# EAGLE board BalanceBoard (EAGLE 6.3)
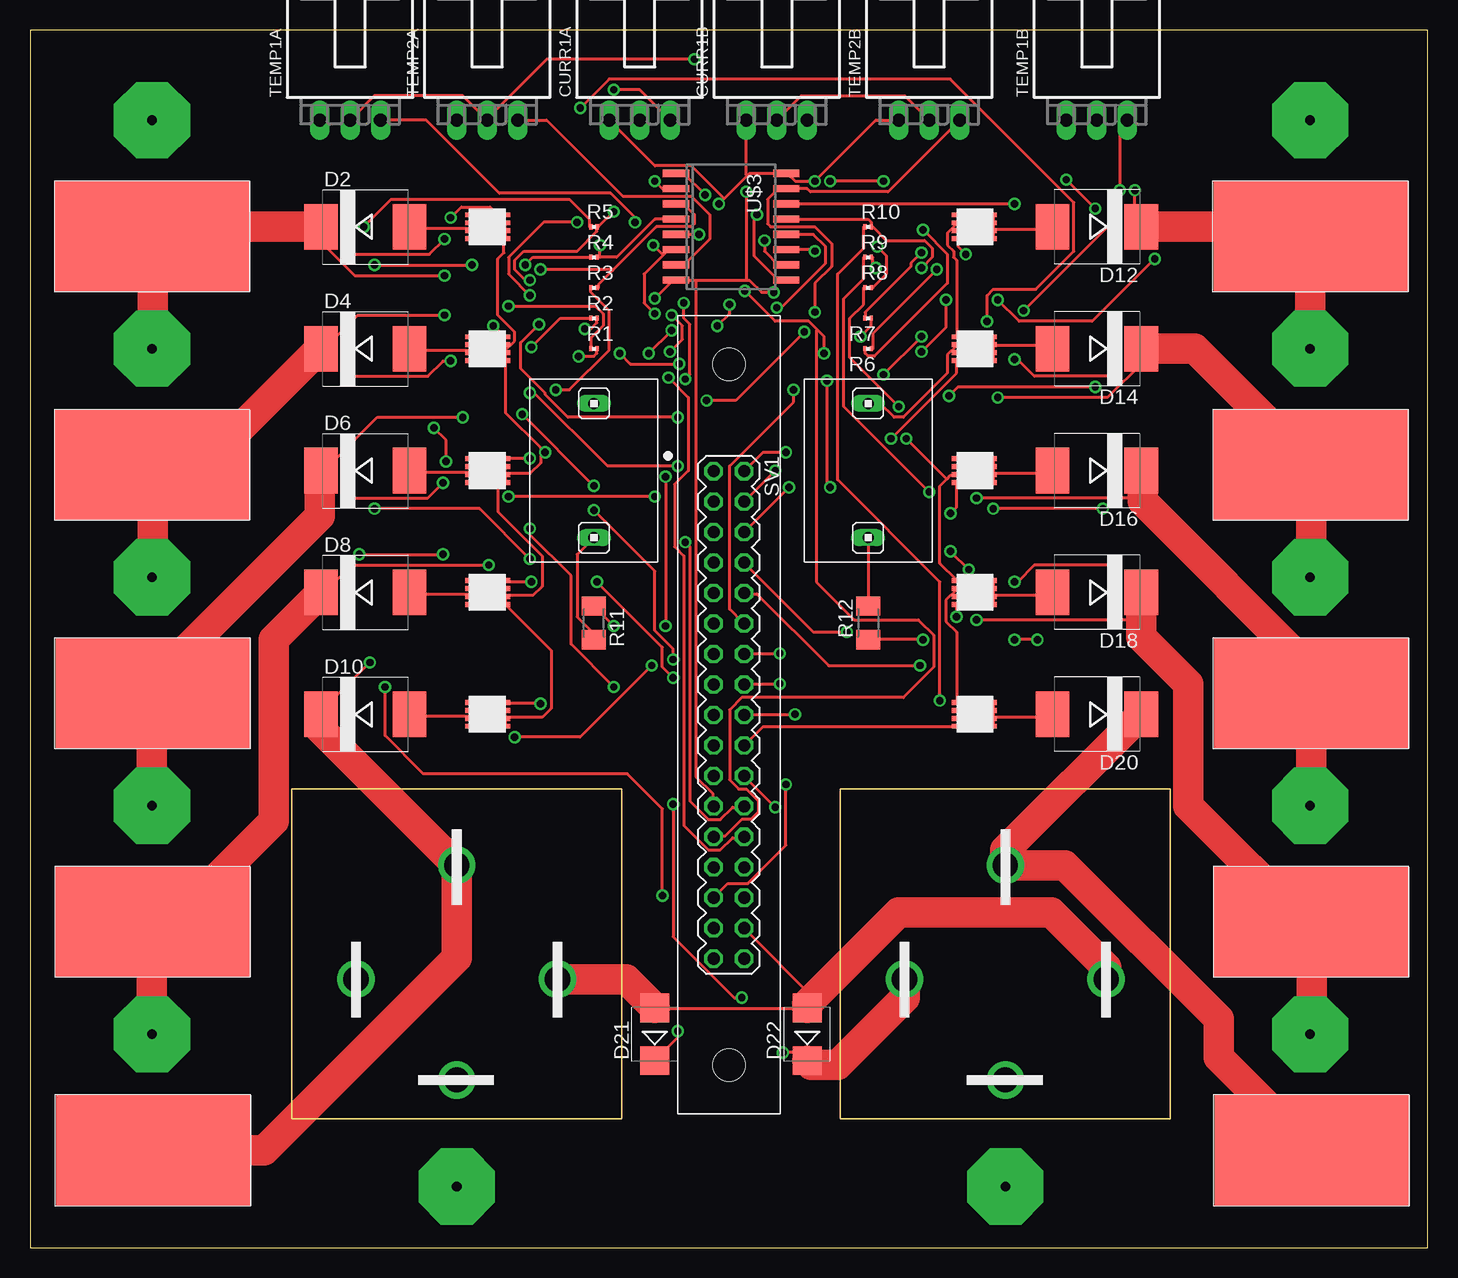
[diagram p0: board, top side]
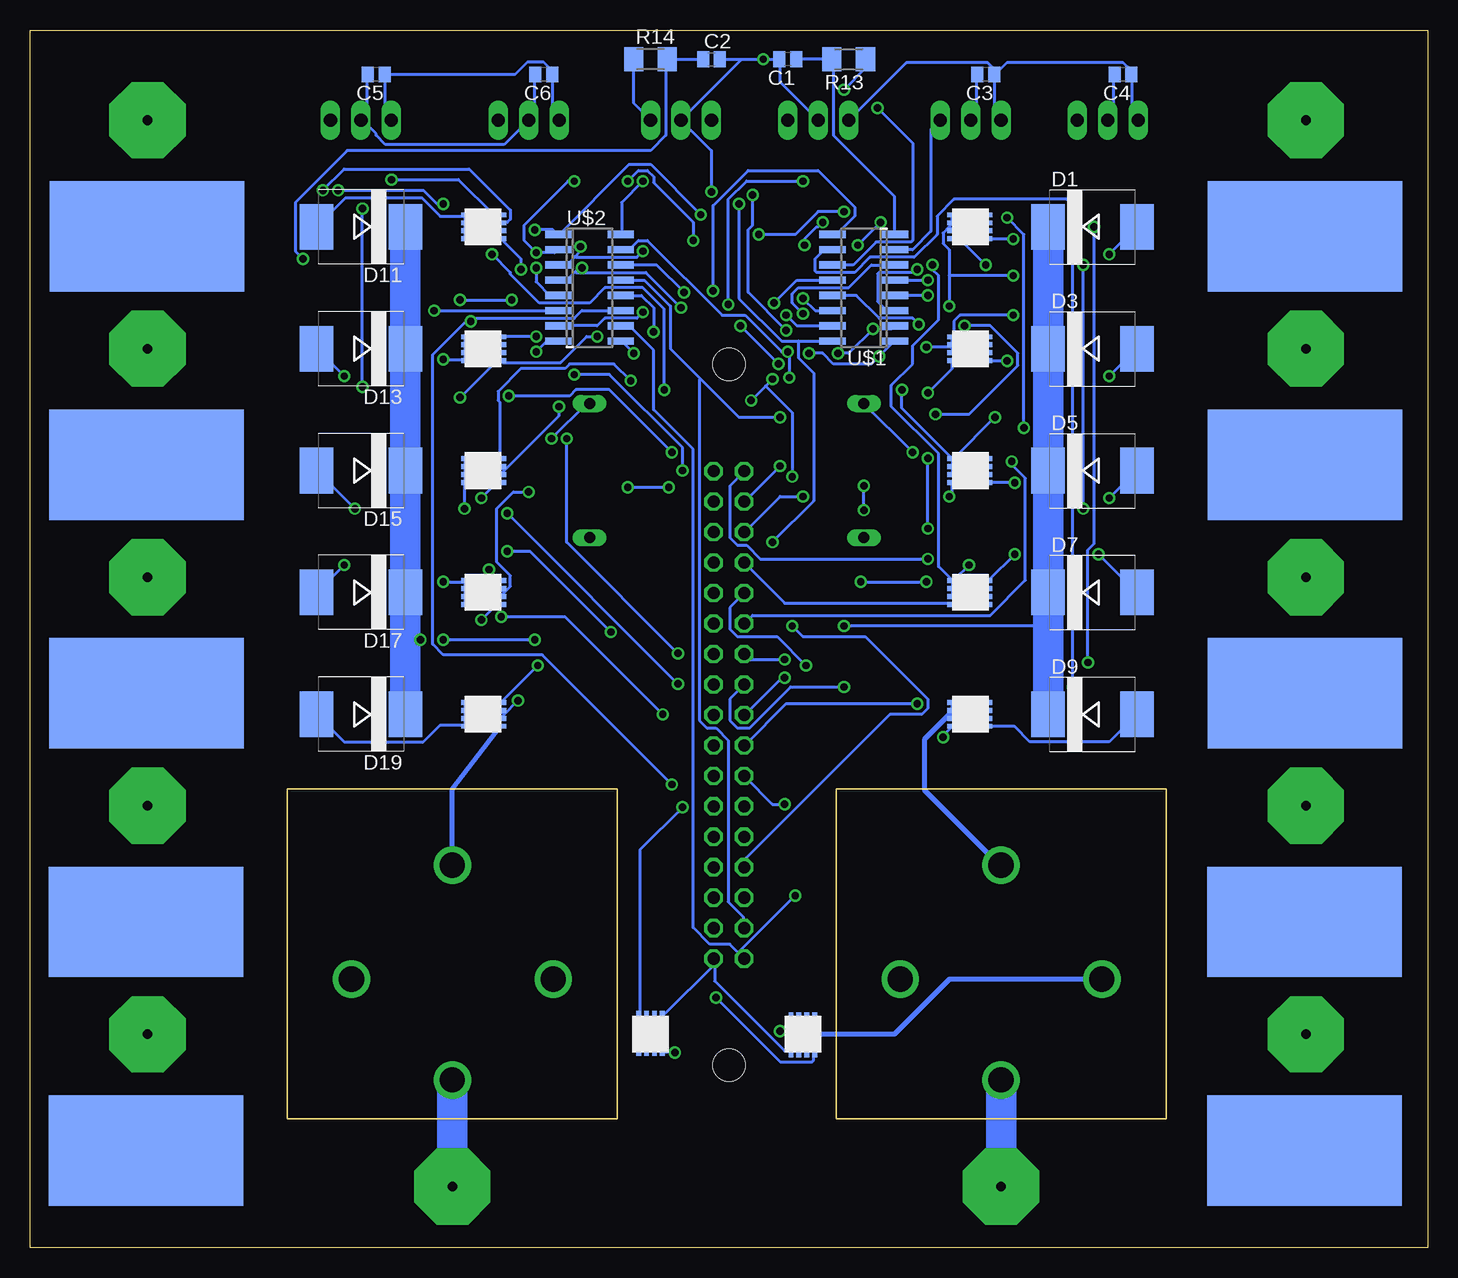
[diagram p1: board, bottom side, seen from below]

Size 116.48 x 101.5 mm. Coordinates in mm from the lower left corner, seen from the top.
Outline: 0,0 116.48,0 116.48,101.5 0,101.5 0,0
Copper layers (1*16): Top 0.035mm / dielectric 1.5mm / Bottom 0.035mm
Design rules "default": minimum track width 10mil, minimum drill 24mil, track to track 8mil, track to pad 8mil, pad to pad 8mil, via to via 8mil, smd to smd 8mil, copper to edge 40mil, drill to drill 8mil, minimum pad ring 10mil, minimum via ring 8mil, stop-mask expansion 4mil, vias tented up to drill 0mil, thermal gap 10mil

## Footprints (pad centres in the part's own frame; a part is rotated, then mirrored left to right if it is on the bottom)
C0504 = smd 1 x 1.3: 1 -0.7,0; 2 0.7,0
70553-03 = drill 1.092 long: 1 -2.54,-7.62; 2 0,-7.62; 3 2.54,-7.62
SMC = smd 2.8 x 3.8: A 3.7,0; C -3.7,0
SMB = smd 2.4 x 2.4: A 2.2,0; C -2.2,0
INDUCTOR_SOCKET = drill 0.914 long: P$1 -5.588,0; P$2 5.588,0
R0201 = smd 0.28 x 0.43: 1 -0.255,0; 2 0.255,0
M1206 = smd 1.6 x 2: 1 -1.4,0; 2 1.4,0
MA17-2 = drill 1.016 octagon: 1 -20.32,-1.27; 2 -20.32,1.27; 3 -17.78,-1.27; 4 -17.78,1.27; 5 -15.24,-1.27; 6 -15.24,1.27; 7 -12.7,-1.27; 8 -12.7,1.27; 9 -10.16,-1.27; 10 -10.16,1.27; 11 -7.62,-1.27; 12 -7.62,1.27; 13 -5.08,-1.27; 14 -5.08,1.27; 15 -2.54,-1.27; 16 -2.54,1.27; 17 0,-1.27; 18 0,1.27; 19 2.54,-1.27; 20 2.54,1.27; 21 5.08,-1.27; 22 5.08,1.27; 23 7.62,-1.27; 24 7.62,1.27; 25 10.16,-1.27; 26 10.16,1.27; 27 12.7,-1.27; 28 12.7,1.27; 29 15.24,-1.27; 30 15.24,1.27; 31 17.78,-1.27; 32 17.78,1.27; 33 20.32,-1.27; 34 20.32,1.27 | hole 2.692: -29.21,0; 29.21,0
SOIC16N = smd 0.6 x 2.2: 1 -4.445,-2.6; 2 -3.175,-2.6; 3 -1.905,-2.6; 4 -0.635,-2.6; 5 0.635,-2.6; 6 1.905,-2.6; 7 3.175,-2.6; 8 4.445,-2.6; 9 4.445,2.6; 10 3.175,2.6; 11 1.905,2.6; 12 0.635,2.6; 13 -0.635,2.6; 14 -1.905,2.6; 15 -3.175,2.6; 16 -4.445,2.6
SO16W = smd 0.6 x 2.2: 1 -4.445,-4.6; 2 -3.175,-4.6; 3 -1.905,-4.6; 4 -0.635,-4.6; 5 0.635,-4.6; 6 1.905,-4.6; 7 3.175,-4.6; 8 4.445,-4.6; 9 4.445,4.6; 10 3.175,4.6; 11 1.905,4.6; 12 0.635,4.6; 13 -0.635,4.6; 14 -1.905,4.6; 15 -3.175,4.6; 16 -4.445,4.6
POWERPAK1212-8 = smd 0.76 x 0.405: DRAIN5 1.435,-0.993; DRAIN6 1.435,-0.333; DRAIN7 1.435,0.333; DRAIN8 1.435,0.993 | smd 1.725 x 2.235: DRAIN_ALL 0.557,0 | smd 0.99 x 0.405: GATE -1.435,-0.993; SOURCE1 -1.435,0.993; SOURCE2 -1.435,0.333; SOURCE3 -1.435,-0.333
MOLEXCONN-SCREWHOLE = smd 16.2 x 9.2: P$1 8.1,4.6 | smd 16.2 x 9.2 bottom: P$2 8.1,4.6
MOLEXCONN-SCREWHOLE-NEG = drill 0.8 pad 6.35 octagon: P$1 0,0
PB1039 = drill 2.1: P$1 0,0; P$2 8.4,-8.4; P$3 8.4,8.4; P$4 17.9,0

## Placement (x,y rotation side)
C1  0.1uF  [C0504]  53.34,99.06 180 bottom
C2  0.1uF  [C0504]  59.69,99.06 0 bottom
C3  0.1uF  [C0504]  36.83,97.79 180 bottom
C4  0.1uF  [C0504]  25.4,97.79 180 bottom
C5  0.1uF  [C0504]  87.63,97.79 180 bottom
C6  0.1uF  [C0504]  73.66,97.79 180 bottom
CURR1A  C-GRID-03-70553  [70553-03]  50.8,101.6 0 top
CURR1B  C-GRID-03-70553  [70553-03]  62.23,101.6 0 top
D1  [SMC]  27.94,85.09 0 bottom
D2  [SMC]  27.94,85.09 0 top
D3  [SMC]  27.94,74.93 0 bottom
D4  [SMC]  27.94,74.93 0 top
D5  [SMC]  27.94,64.77 0 bottom
D6  [SMC]  27.94,64.77 0 top
D7  [SMC]  27.94,54.61 0 bottom
D8  [SMC]  27.94,54.61 0 top
D9  [SMC]  27.94,44.45 0 bottom
D10  [SMC]  27.94,44.45 0 top
D11  [SMC]  88.9,85.09 180 bottom
D12  [SMC]  88.9,85.09 180 top
D13  [SMC]  88.9,74.93 180 bottom
D14  [SMC]  88.9,74.93 180 top
D15  [SMC]  88.9,64.77 180 bottom
D16  [SMC]  88.9,64.77 180 top
D17  [SMC]  88.9,54.61 180 bottom
D18  [SMC]  88.9,54.61 180 top
D19  [SMC]  88.9,44.45 180 bottom
D20  [SMC]  88.9,44.45 180 top
D21  [SMB]  52.07,17.78 90 top
D22  [SMB]  64.77,17.78 90 top
L1  INDUCTOR_SOCKET  [INDUCTOR_SOCKET]  46.99,64.77 90 top
L2  INDUCTOR_SOCKET  [INDUCTOR_SOCKET]  69.85,64.77 90 top
R1  3.3M  [R0201]  46.99,74.93 0 top
R2  3.3M  [R0201]  46.99,77.47 0 top
R3  3.3M  [R0201]  46.99,80.01 0 top
R4  3.3M  [R0201]  46.99,82.55 0 top
R5  3.3M  [R0201]  46.99,85.09 0 top
R6  3.3M  [R0201]  69.85,74.93 180 top
R7  3.3M  [R0201]  69.85,77.47 180 top
R8  3.3M  [R0201]  69.85,80.01 0 top
R9  3.3M  [R0201]  69.85,82.55 0 top
R10  3.3M  [R0201]  69.85,85.09 0 top
R11  [M1206]  46.99,52.07 270 top
R12  [M1206]  69.85,52.07 90 top
R13  1K  [M1206]  48.26,99.06 180 bottom
R14  1K  [M1206]  64.77,99.06 0 bottom
SV1  [MA17-2]  58.24,44.4 270 top
TEMP1A  C-GRID-03-70553  [70553-03]  26.67,101.6 0 top
TEMP1B  C-GRID-03-70553  [70553-03]  88.9,101.6 0 top
TEMP2A  C-GRID-03-70553  [70553-03]  38.1,101.6 0 top
TEMP2B  C-GRID-03-70553  [70553-03]  74.93,101.6 0 top
U$1  MCP3008  [SOIC16N]  46.99,80.01 90 bottom
U$2  MCP3008  [SOIC16N]  69.85,80.01 270 bottom
U$3  SP720APP  [SO16W]  58.42,85.09 270 top
U$4  SIS322DNT-T1-GE3POWERPAK1212-8  [POWERPAK1212-8]  38.1,85.09 0 bottom
U$5  SIS322DNT-T1-GE3POWERPAK1212-8  [POWERPAK1212-8]  38.1,85.09 180 top
U$6  SIS322DNT-T1-GE3POWERPAK1212-8  [POWERPAK1212-8]  38.1,74.93 0 bottom
U$7  SIS322DNT-T1-GE3POWERPAK1212-8  [POWERPAK1212-8]  38.1,74.93 180 top
U$8  SIS322DNT-T1-GE3POWERPAK1212-8  [POWERPAK1212-8]  38.1,64.77 0 bottom
U$9  SIS322DNT-T1-GE3POWERPAK1212-8  [POWERPAK1212-8]  38.1,64.77 180 top
U$10  SIS322DNT-T1-GE3POWERPAK1212-8  [POWERPAK1212-8]  38.1,54.61 0 bottom
U$11  SIS322DNT-T1-GE3POWERPAK1212-8  [POWERPAK1212-8]  38.1,54.61 180 top
U$12  SIS322DNT-T1-GE3POWERPAK1212-8  [POWERPAK1212-8]  38.1,44.45 0 bottom
U$13  SIS322DNT-T1-GE3POWERPAK1212-8  [POWERPAK1212-8]  38.1,44.45 180 top
U$14  MOLEXCONN-SCREWHOLE  [MOLEXCONN-SCREWHOLE]  18.32,88.9 180 top
U$15  MOLEXCONN-SCREWHOLE  [MOLEXCONN-SCREWHOLE]  18.32,69.85 180 top
U$16  MOLEXCONN-SCREWHOLE  [MOLEXCONN-SCREWHOLE]  18.34,50.8 180 top
U$17  MOLEXCONN-SCREWHOLE  [MOLEXCONN-SCREWHOLE]  18.36,31.75 180 top
U$18  MOLEXCONN-SCREWHOLE  [MOLEXCONN-SCREWHOLE]  18.38,12.7 180 top
U$20  MOLEXCONN-SCREWHOLE-NEG  [MOLEXCONN-SCREWHOLE-NEG]  10.16,93.98 0 top
U$21  PB1039  [PB1039]  35.56,13.97 90 top
U$22  MOLEXCONN-SCREWHOLE-NEG  [MOLEXCONN-SCREWHOLE-NEG]  10.16,74.93 0 top
U$23  SIS322DNT-T1-GE3POWERPAK1212-8  [POWERPAK1212-8]  52.07,17.78 90 bottom
U$24  MOLEXCONN-SCREWHOLE-NEG  [MOLEXCONN-SCREWHOLE-NEG]  10.16,55.88 0 top
U$25  MOLEXCONN-SCREWHOLE-NEG  [MOLEXCONN-SCREWHOLE-NEG]  10.16,36.83 0 top
U$26  SIS322DNT-T1-GE3POWERPAK1212-8  [POWERPAK1212-8]  78.74,85.09 180 bottom
U$27  SIS322DNT-T1-GE3POWERPAK1212-8  [POWERPAK1212-8]  78.74,85.09 0 top
U$28  MOLEXCONN-SCREWHOLE-NEG  [MOLEXCONN-SCREWHOLE-NEG]  10.16,17.78 0 top
U$29  MOLEXCONN-SCREWHOLE-NEG  [MOLEXCONN-SCREWHOLE-NEG]  35.56,5.08 0 top
U$30  SIS322DNT-T1-GE3POWERPAK1212-8  [POWERPAK1212-8]  78.74,74.93 180 bottom
U$31  SIS322DNT-T1-GE3POWERPAK1212-8  [POWERPAK1212-8]  78.74,74.93 0 top
U$32  SIS322DNT-T1-GE3POWERPAK1212-8  [POWERPAK1212-8]  78.74,64.77 180 bottom
U$33  SIS322DNT-T1-GE3POWERPAK1212-8  [POWERPAK1212-8]  78.74,64.77 0 top
U$34  SIS322DNT-T1-GE3POWERPAK1212-8  [POWERPAK1212-8]  78.74,54.61 180 bottom
U$35  SIS322DNT-T1-GE3POWERPAK1212-8  [POWERPAK1212-8]  78.74,54.61 0 top
U$36  SIS322DNT-T1-GE3POWERPAK1212-8  [POWERPAK1212-8]  78.74,44.45 180 bottom
U$37  SIS322DNT-T1-GE3POWERPAK1212-8  [POWERPAK1212-8]  78.74,44.45 0 top
U$38  SIS322DNT-T1-GE3POWERPAK1212-8  [POWERPAK1212-8]  64.77,17.78 270 bottom
U$39  PB1039  [PB1039]  81.28,13.97 90 top
U$40  MOLEXCONN-SCREWHOLE  [MOLEXCONN-SCREWHOLE]  114.84,88.9 180 top
U$41  MOLEXCONN-SCREWHOLE  [MOLEXCONN-SCREWHOLE]  114.86,69.85 180 top
U$42  MOLEXCONN-SCREWHOLE  [MOLEXCONN-SCREWHOLE]  114.88,50.8 180 top
U$43  MOLEXCONN-SCREWHOLE  [MOLEXCONN-SCREWHOLE]  114.9,31.75 180 top
U$44  MOLEXCONN-SCREWHOLE  [MOLEXCONN-SCREWHOLE]  114.92,12.7 180 top
U$46  MOLEXCONN-SCREWHOLE-NEG  [MOLEXCONN-SCREWHOLE-NEG]  106.68,93.98 0 top
U$47  MOLEXCONN-SCREWHOLE-NEG  [MOLEXCONN-SCREWHOLE-NEG]  106.68,74.93 0 top
U$48  MOLEXCONN-SCREWHOLE-NEG  [MOLEXCONN-SCREWHOLE-NEG]  106.68,55.88 0 top
U$49  MOLEXCONN-SCREWHOLE-NEG  [MOLEXCONN-SCREWHOLE-NEG]  106.68,36.83 0 top
U$50  MOLEXCONN-SCREWHOLE-NEG  [MOLEXCONN-SCREWHOLE-NEG]  106.68,17.78 0 top
U$51  MOLEXCONN-SCREWHOLE-NEG  [MOLEXCONN-SCREWHOLE-NEG]  81.28,5.08 0 top

## Library data of the parts
C1-C6 = resistor
CURR1A CURR1B TEMP1A TEMP1B TEMP2A TEMP2B = con-molex; OC_FARNELL: unknown; OC_NEWARK: unknown
D1-D22 = diode
L1 L2 U$1-U$18 U$20-U$44 U$46-U$51 = SolarJackets_BMS
R1-R14 = rcl
SV1 = SolarJackets_BMS; OC_FARNELL: unknown; OC_NEWARK: unknown

## Nets
12V+: SV1.34 U$23.SOURCE1 U$23.SOURCE2 U$23.SOURCE3 U$38.SOURCE1 U$38.SOURCE2 U$38.SOURCE3
12V-: D21.A D22.A SV1.32 U$21.P$2 U$39.P$2
AGND_PLANE: C1.2 C2.2 C3.2 C4.2 C5.2 C6.2 CURR1A.2 CURR1B.2 SV1.23 TEMP1A.2 TEMP1B.2 TEMP2A.2 TEMP2B.2 U$1.14 U$2.14 U$3.8
CH0A: D2.C R1.1 U$4.SOURCE1 U$4.SOURCE2 U$4.SOURCE3 U$14.P$1 U$22.P$1
CH0B: D12.C R6.1 U$26.SOURCE1 U$26.SOURCE2 U$26.SOURCE3 U$40.P$1 U$47.P$1
CH1A: D4.C R2.1 U$6.SOURCE1 U$6.SOURCE2 U$6.SOURCE3 U$15.P$1 U$24.P$1
CH1B: D14.C R7.1 U$30.SOURCE1 U$30.SOURCE2 U$30.SOURCE3 U$41.P$1 U$48.P$1
CH2A: D6.C R3.1 U$8.SOURCE1 U$8.SOURCE2 U$8.SOURCE3 U$16.P$1 U$25.P$1
CH2B: D16.C R8.1 U$32.SOURCE1 U$32.SOURCE2 U$32.SOURCE3 U$42.P$1 U$49.P$1
CH3A: D8.C R4.1 U$10.SOURCE1 U$10.SOURCE2 U$10.SOURCE3 U$17.P$1 U$28.P$1
CH3B: D18.C R9.1 U$34.SOURCE1 U$34.SOURCE2 U$34.SOURCE3 U$43.P$1 U$50.P$1
CH4A: D10.C R5.1 U$12.SOURCE1 U$12.SOURCE2 U$12.SOURCE3 U$18.P$1 U$21.P$4
CH4B: D20.C R10.1 U$36.SOURCE1 U$36.SOURCE2 U$36.SOURCE3 U$39.P$4 U$44.P$1
CH5A: TEMP1A.3 U$1.6 U$3.6
CH5B: TEMP1B.3 U$2.6 U$3.14
CH6A: TEMP2A.3 U$1.7 U$3.7
CH6B: TEMP2B.3 U$2.7 U$3.15
CH7A: C1.1 R13.2 U$1.8
CH7B: C2.1 R14.2 U$2.8
CLK: SV1.31 U$1.13 U$2.13
CS: SV1.33 U$1.10 U$2.10
DGND: SV1.25 U$1.9 U$2.9
DIN: SV1.29 U$1.11 U$2.11
DOUT: SV1.27 U$1.12 U$2.12
N$1: R5.2 U$1.5 U$3.5
N$2: R4.2 U$1.4 U$3.4
N$3: R3.2 U$1.3 U$3.3
N$4: R2.2 U$1.2 U$3.2
N$5: R1.2 U$1.1 U$3.1
N$6: CURR1A.3 R13.1
N$7: CURR1B.3 R14.1
N$8: D1.A U$4.DRAIN5 U$4.DRAIN6 U$4.DRAIN7 U$4.DRAIN8 U$4.DRAIN_ALL
N$11: R10.2 U$2.5 U$3.13
N$12: R9.2 U$2.4 U$3.12
N$13: R8.2 U$2.3 U$3.11
N$14: R7.2 U$2.2 U$3.10
N$15: R6.2 U$2.1 U$3.9
N$16: D2.A U$5.DRAIN5 U$5.DRAIN6 U$5.DRAIN7 U$5.DRAIN8 U$5.DRAIN_ALL
N$17: D21.C U$21.P$3 U$23.DRAIN5 U$23.DRAIN6 U$23.DRAIN7 U$23.DRAIN8 U$23.DRAIN_ALL
N$18: L1.P$1 R11.2
N$23: D3.A U$6.DRAIN5 U$6.DRAIN6 U$6.DRAIN7 U$6.DRAIN8 U$6.DRAIN_ALL
N$24: D4.A U$7.DRAIN5 U$7.DRAIN6 U$7.DRAIN7 U$7.DRAIN8 U$7.DRAIN_ALL
N$25: U$21.P$1 U$29.P$1
N$26: D11.A U$26.DRAIN5 U$26.DRAIN6 U$26.DRAIN7 U$26.DRAIN8 U$26.DRAIN_ALL
N$27: D5.A U$8.DRAIN5 U$8.DRAIN6 U$8.DRAIN7 U$8.DRAIN8 U$8.DRAIN_ALL
N$28: D6.A U$9.DRAIN5 U$9.DRAIN6 U$9.DRAIN7 U$9.DRAIN8 U$9.DRAIN_ALL
N$29: D12.A U$27.DRAIN5 U$27.DRAIN6 U$27.DRAIN7 U$27.DRAIN8 U$27.DRAIN_ALL
N$31: D7.A U$10.DRAIN5 U$10.DRAIN6 U$10.DRAIN7 U$10.DRAIN8 U$10.DRAIN_ALL
N$32: D8.A U$11.DRAIN5 U$11.DRAIN6 U$11.DRAIN7 U$11.DRAIN8 U$11.DRAIN_ALL
N$33: U$20.P$1
N$34: D13.A U$30.DRAIN5 U$30.DRAIN6 U$30.DRAIN7 U$30.DRAIN8 U$30.DRAIN_ALL
N$35: D9.A U$12.DRAIN5 U$12.DRAIN6 U$12.DRAIN7 U$12.DRAIN8 U$12.DRAIN_ALL
N$36: D10.A U$13.DRAIN5 U$13.DRAIN6 U$13.DRAIN7 U$13.DRAIN8 U$13.DRAIN_ALL
N$37: D14.A U$31.DRAIN5 U$31.DRAIN6 U$31.DRAIN7 U$31.DRAIN8 U$31.DRAIN_ALL
N$38: D15.A U$32.DRAIN5 U$32.DRAIN6 U$32.DRAIN7 U$32.DRAIN8 U$32.DRAIN_ALL
N$39: D16.A U$33.DRAIN5 U$33.DRAIN6 U$33.DRAIN7 U$33.DRAIN8 U$33.DRAIN_ALL
N$41: D17.A U$34.DRAIN5 U$34.DRAIN6 U$34.DRAIN7 U$34.DRAIN8 U$34.DRAIN_ALL
N$42: D18.A U$35.DRAIN5 U$35.DRAIN6 U$35.DRAIN7 U$35.DRAIN8 U$35.DRAIN_ALL
N$43: D19.A U$36.DRAIN5 U$36.DRAIN6 U$36.DRAIN7 U$36.DRAIN8 U$36.DRAIN_ALL
N$44: D20.A U$37.DRAIN5 U$37.DRAIN6 U$37.DRAIN7 U$37.DRAIN8 U$37.DRAIN_ALL
N$45: L2.P$2 U$27.SOURCE1 U$27.SOURCE2 U$27.SOURCE3 U$31.SOURCE1 U$31.SOURCE2 U$31.SOURCE3 U$33.SOURCE1 U$33.SOURCE2 U$33.SOURCE3 U$35.SOURCE1 U$35.SOURCE2 U$35.SOURCE3 U$37.SOURCE1 U$37.SOURCE2 U$37.SOURCE3
N$46: U$39.P$1 U$51.P$1
N$47: D22.C U$38.DRAIN5 U$38.DRAIN6 U$38.DRAIN7 U$38.DRAIN8 U$38.DRAIN_ALL U$39.P$3
N$48: U$46.P$1
N$49: D11.C D13.C D15.C D17.C D19.C R12.1
N$50: L2.P$1 R12.2
N$59: L1.P$2 U$5.SOURCE1 U$5.SOURCE2 U$5.SOURCE3 U$7.SOURCE1 U$7.SOURCE2 U$7.SOURCE3 U$9.SOURCE1 U$9.SOURCE2 U$9.SOURCE3 U$11.SOURCE1 U$11.SOURCE2 U$11.SOURCE3 U$13.SOURCE1 U$13.SOURCE2 U$13.SOURCE3
N$74: D1.C D3.C D5.C D7.C D9.C R11.1
RELAYA: SV1.21 U$23.GATE
RELAYB: SV1.22 U$38.GATE
VDD_PLANE: C3.1 C4.1 C5.1 C6.1 CURR1A.1 CURR1B.1 SV1.24 TEMP1A.1 TEMP1B.1 TEMP2A.1 TEMP2B.1 U$1.16 U$2.16 U$3.16
VREF: SV1.26 U$1.15 U$2.15
X0A: SV1.1 U$4.GATE
X0B: SV1.2 U$26.GATE
X1A: SV1.3 U$6.GATE
X1B: SV1.4 U$30.GATE
X2A: SV1.5 U$8.GATE
X2B: SV1.6 U$32.GATE
X3A: SV1.7 U$10.GATE
X3B: SV1.8 U$34.GATE
X4A: SV1.9 U$12.GATE
X4B: SV1.10 U$36.GATE
Y0A: SV1.11 U$5.GATE
Y0B: SV1.12 U$27.GATE
Y1A: SV1.13 U$7.GATE
Y1B: SV1.14 U$31.GATE
Y2A: SV1.15 U$9.GATE
Y2B: SV1.16 U$33.GATE
Y3A: SV1.17 U$11.GATE
Y3B: SV1.18 U$35.GATE
Y4A: SV1.19 U$13.GATE
Y4B: SV1.20 U$37.GATE

## Tracks (layer width: path | path; a pad name or v marks a point on that pad's centre or on a via)
12V+
  Bottom 0.254: U$38.SOURCE3 65.02,19.18 64.52,19.18 U$38.SOURCE2 64.39,19.18 63.88,19.18 U$38.SOURCE1 63.75,19.3 59.44,23.62 | U$23.SOURCE3 51.82,16.38 52.32,16.38 U$23.SOURCE2 52.45,16.38 52.96,16.38 U$23.SOURCE1 53.09,16.38 53.59,16.38 59.44,22.23 59.44,23.62 | 59.44,23.62 59.44,24 SV1.34 59.44,23.62
12V-
  Top 0.254: 65.28,20.83 59.56,26.54 SV1.32 | D22.A 63.63,19.94 53.21,19.94 D21.A
  Top 2.54: U$21.P$2 49.68,22.37 D21.A | U$39.P$2 89.68,23.35 85.09,27.94 72.39,27.94 65.28,20.83 64.77,20.32 D22.A
AGND_PLANE  (via drill 0.61)
  Top 0.254: v52.07,79.12 53.59,80.64 U$3.8 55.5,80.64 | v61.98,79.63 60.96,79.63 59.94,80.64 59.69,80.64 | 55.5,80.64 59.69,80.64 | 55.5,80.64 55.5,39.24 56.9,37.85 56.9,36.83 SV1.23 | TEMP1A.2 28.7,96.01 36.07,96.01 TEMP2A.2 38.1,94.11 43.05,99.06 v55.37,99.06 | TEMP2B.2 72.9,96.01 64.26,96.01 CURR1B.2 | v59.69,88.01 59.69,80.64
  Bottom 0.254: U$1.14 51.05,78.11 v52.07,79.12 | U$2.14 64.26,81.92 v61.98,79.63 | TEMP1A.2 26.16,94.49 26.16,97.79 C4.2 | TEMP2A.2 37.59,94.49 37.59,97.79 C3.2 | C5.2 88.39,97.79 88.39,94.49 TEMP1B.2 88.77,93.98 87.63,92.84 87.63,92.71 86.87,91.95 76.96,91.95 TEMP2B.2 74.42,94.49 74.42,97.79 C6.2 | C2.2 57.15,99.06 | 57.15,99.06 v55.37,99.06 C1.2 53.98,99.06 53.98,97.16 CURR1A.2 | 57.15,99.06 CURR1B.2 59.69,91.44 v59.69,88.01
CH0A  (via drill 0.61)
  Top 0.254: v39.88,78.49 47.12,78.49 47.75,77.85 47.75,76.83 46.74,75.82 R1.1 | v34.54,81.03 27.05,81.03 24.13,83.95 D2.C
  Top 2.54: U$22.P$1 10.22,74.93 U$14.P$1 11.91,84.3 12.7,85.09 D2.C 24.24,85.57
  Bottom 0.254: 39.88,81.03 39.88,83.19 40.39,83.69 40.39,84.58 39.88,85.09 | 39.88,81.03 v39.88,78.49 | 39.88,85.09 39.62,85.34 U$4.SOURCE2 39.62,85.47 39.62,85.98 U$4.SOURCE1 | 39.88,85.09 39.62,84.84 U$4.SOURCE3 | v34.54,81.03 39.88,81.03
CH0B  (via drill 0.61)
  Top 0.254: v75.56,81.53 70.23,76.2 70.23,74.93 R6.1 | v92.08,88.14 92.08,86.23 D12.C
  Top 2.54: D12.C 106.68,85.09 106.68,84.36 | 106.68,84.36 U$47.P$1 | 106.68,84.36 U$40.P$1
  Bottom 0.254: v75.56,81.53 75.56,82.42 77.22,84.07 U$26.SOURCE1 77.34,84.2 77.34,84.71 U$26.SOURCE2 77.34,84.84 77.34,85.34 U$26.SOURCE3 77.22,85.47 76.71,85.47 76.45,85.72 76.45,86.49 79.88,89.92 90.3,89.92 v92.08,88.14
CH1A  (via drill 0.61)
  Top 0.254: R2.1 44.2,77.47 v41.78,75.06 | v34.54,77.72 27.3,77.72 25.27,75.69 D4.C
  Top 2.54: U$24.P$1 10.22,55.88 U$15.P$1 14.45,65.25 24.13,74.93 D4.C
  Bottom 0.254: v41.78,75.06 39.75,75.06 39.69,75.12 | 39.69,75.12 39.62,75.18 U$6.SOURCE2 39.62,75.31 39.62,75.82 U$6.SOURCE1 39.5,75.95 39.5,77.22 38.99,77.72 v34.54,77.72 | U$6.SOURCE3 39.62,74.68 39.62,75.06 39.69,75.12
CH1B  (via drill 0.61)
  Top 0.254: v69.22,75.95 70.1,76.83 R7.1 | v80.64,70.87 89.79,70.87 92.71,73.79 D14.C
  Top 2.54: D14.C 97.08,74.93 U$41.P$1 106.76,55.96 U$48.P$1
  Bottom 0.254: U$30.SOURCE3 77.34,75.18 77.34,74.68 U$30.SOURCE2 77.34,74.55 77.34,74.04 U$30.SOURCE1 | v69.22,75.95 70.1,75.95 72.26,73.79 77.09,73.79 77.22,73.91 U$30.SOURCE1 | v80.64,70.87 77.47,74.04 U$30.SOURCE1
CH2A  (via drill 0.61)
  Top 0.254: v43.81,71.5 44.96,71.5 48.26,74.8 48.26,78.11 46.74,79.63 R3.1 | v36.07,69.22 28.96,69.22 25.27,65.53 D6.C
  Top 2.54: U$25.P$1 10.16,46.12 U$16.P$1 10.24,47.07 24.13,60.96 24.13,64.66 D6.C
  Bottom 0.254: U$8.SOURCE3 39.62,64.52 39.62,65.02 U$8.SOURCE2 39.62,65.15 39.62,65.66 U$8.SOURCE1 | v43.81,71.5 43.81,69.98 39.62,65.79 U$8.SOURCE1 | v36.07,69.22 39.5,65.79 U$8.SOURCE1
CH2B  (via drill 0.61)
  Top 0.254: v72.39,70.1 68.33,74.17 68.33,77.47 69.47,78.61 69.47,80.01 R8.1 | v78.87,62.48 91.57,62.48 92.71,62.23
  Top 2.54: U$49.P$1 106.78,36.93 U$42.P$1 106.78,48.16 92.71,62.23 92.71,64.66 D16.C
  Bottom 0.254: v72.39,70.1 72.39,69.34 76.96,64.77 | 76.96,64.77 77.22,64.52 U$32.SOURCE2 77.34,64.39 77.34,63.88 U$32.SOURCE1 77.47,63.88 v78.87,62.48 | 76.96,64.77 77.22,65.02 U$32.SOURCE3
CH3A  (via drill 0.61)
  Top 0.254: R4.1 41.91,82.55 v41.27,81.92 | v38.23,56.9 26.8,56.9 25.27,55.37 D8.C
  Top 2.54: U$28.P$1 10.16,27.05 U$17.P$1 11.91,27.15 20.32,35.56 20.32,50.69 D8.C
  Bottom 0.254: U$10.SOURCE3 39.62,54.36 39.62,54.86 U$10.SOURCE2 39.62,54.99 39.62,55.5 U$10.SOURCE1 | v41.27,81.92 41.27,81.53 40.77,81.03 40.77,77.34 42.93,75.18 42.93,73.66 44.7,71.88 44.7,70.1 40.77,66.17 40.77,56.77 39.62,55.63 U$10.SOURCE1 | v38.23,56.9 39.5,55.63 U$10.SOURCE1
CH3B  (via drill 0.61)
  Top 0.254: v74.93,62.99 67.82,70.1 67.82,79.12 69.47,80.77 69.47,82.55 R9.1 | 92.6,52.32 v78.87,52.32
  Top 2.54: D18.C 92.6,52.32 92.6,50.91 96.52,46.99 96.52,36.83 106.68,26.67 106.68,27.03 U$43.P$1 106.8,17.9 U$50.P$1
  Bottom 0.254: v74.93,62.99 76.2,62.99 77.6,61.59 77.6,57.15 76.45,56.01 76.45,55.12 76.96,54.61 | 76.96,54.61 77.22,54.36 U$34.SOURCE2 77.34,54.23 77.34,53.72 U$34.SOURCE1 77.47,53.72 v78.87,52.32 | 76.96,54.61 77.22,54.86 U$34.SOURCE3
CH4A  (via drill 0.61)
  Top 0.254: v27.81,85.09 30.1,87.38 44.96,87.38 46.61,85.72 46.61,85.09 R5.1 | v28.32,48.77 25.02,45.47 D10.C
  Top 2.54: U$18.P$1 19.53,8.1 35.56,24.13 U$21.P$4 24.24,43.19 D10.C
  Bottom 0.254: v27.81,85.09 27.81,58.67 28.32,58.17 v28.32,48.77 | 39.87,44.45 39.62,44.2 U$12.SOURCE3 | U$12.SOURCE1 39.62,45.34 39.62,44.96 U$12.SOURCE2
  Bottom 0.406: U$21.P$4 35.68,31.87 41.91,38.1 41.91,42.41 39.87,44.45 U$12.SOURCE2
CH4B  (via drill 0.61)
  Top 0.254: v75.82,45.59 75.82,55.5 67.31,64.01 67.31,81.15 69.47,83.31 69.47,85.09 R10.1
  Top 2.54: D20.C 81.28,33.13 U$39.P$4 86.24,31.87 99.06,19.05 99.06,15.86 U$44.P$1
  Bottom 0.254: 76.96,44.45 77.22,44.2 U$36.SOURCE2 77.34,44.07 77.34,43.56 U$36.SOURCE1 | 76.96,44.45 v75.82,45.59 | 76.96,44.45 77.22,44.7 U$36.SOURCE3
  Bottom 0.406: U$36.SOURCE1 81.28,38.21 U$39.P$4
CH5A  (via drill 0.61)
  Top 0.254: v52.07,77.85 51.18,78.74 51.18,81.15 52.77,82.74 | 52.77,82.74 53.21,83.19 U$3.6 | TEMP1A.3 33.02,93.98 39.12,87.88 48.39,87.88 50.42,85.85 v50.42,85.47 | 52.77,82.74 v51.94,83.57
  Bottom 0.254: U$1.6 46.35,81.92 48.26,80.01 52.45,80.01 52.96,79.5 52.96,78.74 v52.07,77.85 | v50.42,85.47 50.8,85.09 50.93,85.09 51.94,84.07 v51.94,83.57
CH5B  (via drill 0.61)
  Top 0.254: v82.8,78.11 90.81,86.11 v90.81,88.14 90.81,93.34 TEMP1B.3 | v82.04,87 U$3.14
  Bottom 0.254: v82.8,78.11 U$2.6 | v82.04,87 82.55,87 83.69,88.14 v90.81,88.14
CH6A
  Top 0.254: U$3.7 54.48,81.92 56.64,84.07 56.64,86.11 55.12,87.63 49.4,87.63 43.05,93.98 TEMP2A.3
  Bottom 0.254: U$1.7 42.93,83.19 41.4,84.71 41.4,93.22 TEMP2A.3
CH6B  (via drill 0.61)
  Top 0.254: TEMP2B.3 71.5,88.01 65.02,88.01 64.77,88.27 U$3.15 62.36,88.27 61.47,87.38 61.47,85.34 61.72,85.09 65.41,85.09 66.8,83.69 66.8,81.79 65.41,80.39 v65.41,77.98
  Bottom 0.254: U$2.7 69.22,76.83 68.58,77.47 65.91,77.47 v65.41,77.98
CH7A
  Bottom 0.254: C1.1 R13.2 49.53,98.93 49.53,92.71 44.45,87.63 44.45,84.45 U$1.8
CH7B  (via drill 0.61)
  Top 0.254: v74.3,74.68 76.33,76.71 v76.33,78.99 | v80.64,78.99 82.42,77.22 88.52,77.22 v93.73,82.42
  Bottom 0.254: C2.1 R14.2 63.5,98.93 63.5,92.71 64.77,91.44 90.04,91.44 94.36,87.12 94.36,83.06 v93.73,82.42 | U$2.8 73.41,75.56 v74.3,74.68 | v80.64,78.99 v76.33,78.99
CLK  (via drill 0.61)
  Top 0.254: v42.42,76.96 40.89,75.44 40.89,73.28 42.93,71.25 42.93,71.12 44.83,69.22 v53.98,69.22
  Bottom 0.254: U$1.13 47.62,79.38 45.72,77.47 42.93,77.47 v42.42,76.96 | v53.98,69.22 57.4,69.22 60.64,72.45 | 60.64,72.45 63.12,74.93 63.12,78.49 65.28,80.64 U$2.13 | SV1.31 57.02,26.67 57.02,27.56 58.29,28.83 58.29,42.29 59.31,43.31 60.07,43.31 60.71,43.94 60.71,72.39 60.64,72.45
CS  (via drill 0.61)
  Top 0.254: v29.59,46.74 29.59,42.67 32.77,39.5 49.78,39.5 52.7,36.58 v52.7,29.34
  Bottom 0.254: U$2.10 66.55,76.83 64.52,74.8 64.52,69.85 61.21,66.55 61.21,26.67 59.82,25.27 58.17,25.27 57.02,24.13 SV1.33 57.4,24.64 v52.7,29.34 | U$1.10 50.29,83.19 51.05,82.42 51.05,81.41 50.93,81.28 47.75,81.28 46.48,82.55 42.8,82.55 40.89,84.45 40.89,85.98 39.5,87.38 30.1,87.38 29.59,86.87 v29.59,46.74
DGND  (via drill 0.61)
  Top 0.254: v59.56,79.76 62.1,77.22 64.9,77.22 65.6,76.52 | 65.6,76.52 66.17,75.95 v66.17,74.55 | SV1.25 57.02,34.29 57.91,34.29 59.31,35.69 60.07,35.69 60.71,36.32 60.71,37.21 59.69,38.23 59.05,38.23 58.29,38.99 58.29,44.83 59.31,45.85 72.77,45.85 75.31,48.39 75.31,51.05 74.04,52.32 68.71,52.32 65.53,55.5 65.53,76.45 65.6,76.52
  Bottom 0.254: U$1.9 49.28,84.45 47.75,85.98 47.75,86.74 50.8,89.79 56.64,89.79 59.56,86.87 v59.56,79.76 | v66.17,74.55 67.18,75.56 U$2.9
DIN  (via drill 0.61)
  Top 0.254: v62.99,38.61 62.99,33.53 59.82,30.35 58.17,30.35 57.02,29.21 SV1.29 | v45.85,95 48.26,97.41 76.71,97.41 87,87.12 87,83.06 83.82,79.88 80.26,79.88 79.76,79.38 v79.76,77.22
  Bottom 0.254: U$2.11 70.48,78.11 71.12,77.47 79.88,77.47 79.95,77.41 | 79.95,77.41 82.93,74.42 82.93,50.29 82.04,49.4 73.79,49.4 v62.99,38.61 | U$1.11 47.88,81.92 45.97,83.82 43.05,83.82 42.93,83.95 42.93,92.08 v45.85,95 | 79.95,77.41 v79.76,77.22
DOUT  (via drill 0.61)
  Top 0.254: v54.48,78.74 54.48,77.47 54.99,76.96 54.99,72.77 v54.61,72.39 | v56.39,70.61 58.8,70.61 v64.52,76.33 | v52.96,64.26 v52.96,51.82
  Bottom 0.254: U$1.12 52.58,80.64 v54.48,78.74 | v56.39,70.61 55.18,71.82 | 55.18,71.82 v54.61,72.39 | v64.52,76.33 64.52,78.36 65.53,79.38 U$2.12 | v52.96,51.82 52.07,50.93 46.86,50.93 41.66,45.72 41.66,44.96 42.16,44.45 44.83,44.45 56.9,32.38 56.9,31.75 SV1.27 | v52.96,64.26 52.96,69.6 55.18,71.82
N$1  (via drill 0.61)
  Top 0.254: v41.66,80.64 41.27,80.64 40.39,81.53 40.39,82.3 41.15,83.06 45.59,83.06 47.24,84.71 R5.2 47.37,85.09 v48.64,86.36 | v55.75,84.45 U$3.5
  Bottom 0.254: U$1.5 v41.66,80.64 | v55.75,84.45 52.7,84.45 50.8,86.36 v48.64,86.36
N$2  (via drill 0.61)
  Top 0.254: 47.5,82.55 48.9,82.55 52.07,85.72 U$3.4 | 47.5,82.55 R4.2 | v41.66,79.38 39.88,81.15 39.88,82.55 42.8,85.47 v45.59,85.47 | 47.5,82.55 v47.5,83.57
  Bottom 0.254: v41.66,79.38 U$1.4 | v47.5,83.57 v45.59,85.47
N$3  (via drill 0.61)
  Top 0.254: 48.58,81.47 52.2,85.09 55.12,85.09 55.37,85.34 55.37,86.11 54.48,87 U$3.3 | 48.58,81.47 47.37,80.26 47.37,80.01 R3.2 | v42.55,81.53 48.51,81.53 48.58,81.47
  Bottom 0.254: U$1.3 45.09,78.11 45.85,78.87 45.85,81.15 45.72,81.28 42.8,81.28 v42.55,81.53
N$4  (via drill 0.61)
  Top 0.254: v46.23,76.58 46.74,76.58 47.24,77.09 R2.2 | U$3.2 52.7,88.27 v52.07,88.9 | v58.29,78.61 58.29,77.85 v57.28,76.83 | v54.1,73.66 50.04,73.66 v49.15,74.55
  Bottom 0.254: U$1.2 44.45,76.83 44.7,76.58 v46.23,76.58 48.26,74.55 v49.15,74.55 | v52.07,88.9 56.77,88.9 58.29,87.38 v58.29,78.61 | v54.1,73.66 v57.28,76.83
N$5  (via drill 0.61)
  Top 0.254: v45.72,74.3 46.99,74.3 47.24,74.55 R1.2 | U$3.1 54.48,89.53 v56.26,87.76 | v51.56,74.55 v53.47,76.45
  Bottom 0.254: U$1.1 44.45,75.56 v45.72,74.3 46.35,73.66 49.53,73.66 50.42,74.55 v51.56,74.55 | v56.26,87.76 56.26,85.22 56.64,84.84 56.64,79.63 v53.47,76.45
N$6  (via drill 0.61)
  Top 0.254: v48.64,96.52 50.8,96.52 CURR1A.3
  Bottom 0.254: v48.64,96.52 46.86,98.3 R13.1
N$7
  Bottom 0.254: CURR1B.3 66.17,95.38 R14.1
N$8  (via drill 0.61)
  Top 0.254: v34.54,84.07 33.27,82.8 v26.54,82.8
  Bottom 0.254: U$4.DRAIN_ALL 36.7,84.71 36.7,84.2 U$4.DRAIN5 36.58,84.07 v34.54,84.07 | U$4.DRAIN6 36.7,84.84 U$4.DRAIN_ALL | U$4.DRAIN_ALL 36.7,84.96 36.7,85.34 U$4.DRAIN7 36.7,85.47 36.7,85.98 U$4.DRAIN8 | v26.54,82.8 24.26,85.09 D1.A
N$11  (via drill 0.61)
  Top 0.254: U$3.13 69.85,85.72 70.1,85.47 R10.2 70.23,85.09 71.37,83.95 74.55,83.95 75.18,83.31 75.18,82.55 v74.3,81.66
  Bottom 0.254: U$2.5 73.15,79.38 74.3,80.52 v74.3,81.66
N$12  (via drill 0.61)
  Top 0.254: v70.48,81.66 70.23,81.92 70.23,82.55 R9.2 | U$3.12 65.28,84.45 66.29,83.44 66.29,82.04 62.61,78.36 v62.23,78.36
  Bottom 0.254: v70.48,81.66 70.74,81.66 71.06,81.34 | 71.06,81.34 71.75,80.64 U$2.4 | v62.23,78.36 65.15,81.28 70.99,81.28 71.06,81.34
N$13  (via drill 0.61)
  Top 0.254: v70.61,83.44 71.37,82.68 71.37,81.15 70.23,80.01 R8.2 | U$3.11 65.28,83.19 v65.41,83.06
  Bottom 0.254: v70.61,83.44 70.61,83.06 71.06,82.61 | 71.06,82.61 71.75,81.92 U$2.3 | v65.41,83.06 65.91,82.55 70.99,82.55 71.06,82.61
N$14  (via drill 0.61)
  Top 0.254: v74.3,82.93 73.41,82.04 73.41,81.79 69.6,77.98 R7.2 | U$3.10 62.36,81.92 61.21,83.06 v61.21,83.95 | v71.12,88.9 v66.67,88.9
  Bottom 0.254: U$2.2 72.52,83.19 72.77,82.93 v74.3,82.93 75.31,83.95 75.31,85.22 71.63,88.9 v71.12,88.9 | v61.21,83.95 61.21,85.47 64.52,88.77 64.52,89.28 65.02,89.79 65.79,89.79 v66.67,88.9
N$15  (via drill 0.61)
  Top 0.254: v74.42,84.84 76.45,82.8 76.45,80.39 70.36,74.3 69.85,74.3 69.6,74.55 R6.2 | U$3.9 62.36,80.64 60.33,82.68 60.33,85.85 v60.58,86.11
  Bottom 0.254: v74.42,84.84 72.9,84.84 72.52,84.45 U$2.1 72.39,84.45 66.55,90.3 64.77,90.3 v60.58,86.11
N$16
  Top 0.254: U$5.DRAIN8 36.7,84.2 36.7,84.71 U$5.DRAIN_ALL | U$5.DRAIN7 36.7,84.84 U$5.DRAIN_ALL | 36.7,84.96 36.7,85.34 U$5.DRAIN6 36.7,85.47 36.7,85.98 U$5.DRAIN5 | 36.7,84.96 U$5.DRAIN_ALL | 36.7,84.96 31.88,84.96 31.75,85.09 D2.A
N$17  (via drill 0.61)
  Top 0.254: v53.98,18.03 53.98,17.53 52.07,15.62 D21.C
  Bottom 0.254: U$23.DRAIN5 51.18,19.18 51.69,19.18 U$23.DRAIN6 | U$23.DRAIN8 52.96,19.18 52.45,19.18 U$23.DRAIN7 52.32,19.18 51.82,19.18 U$23.DRAIN6 | U$23.DRAIN6 51.82,19.05 51.82,18.29 U$23.DRAIN_ALL 52.96,19.05 v53.98,18.03
  Bottom 0.406: U$21.P$3 39.86,22.37 44.45,17.78 51.51,17.78 U$23.DRAIN_ALL
N$18
  Top 0.254: R11.2 46.99,51.18 45.59,52.58 45.59,57.78 L1.P$1
N$23  (via drill 0.61)
  Top 0.254: v35.05,73.91 34.42,73.91 33.15,72.64 v26.54,72.64
  Bottom 0.254: U$6.DRAIN_ALL 36.7,74.55 36.7,74.04 U$6.DRAIN5 36.58,73.91 v35.05,73.91 | U$6.DRAIN6 36.7,74.68 U$6.DRAIN_ALL | U$6.DRAIN_ALL 36.7,74.8 36.7,75.18 U$6.DRAIN7 36.7,75.31 36.7,75.82 U$6.DRAIN8 | v26.54,72.64 24.26,74.93 D3.A
N$24
  Top 0.254: U$7.DRAIN8 36.7,74.04 36.7,74.55 U$7.DRAIN_ALL | U$7.DRAIN7 36.7,74.68 U$7.DRAIN_ALL | 36.7,74.8 36.7,75.18 U$7.DRAIN6 36.7,75.31 36.7,75.82 U$7.DRAIN5 | 36.7,74.8 U$7.DRAIN_ALL | 36.7,74.8 31.88,74.8 31.75,74.93 D4.A
N$25
  Bottom 2.54: U$21.P$1 U$29.P$1
N$26
  Bottom 0.254: U$26.DRAIN8 80.26,84.2 80.26,84.71 U$26.DRAIN7 | U$26.DRAIN7 80.26,84.84 80.26,85.34 U$26.DRAIN6 80.26,85.47 80.26,85.98 U$26.DRAIN5 80.39,85.98 82.3,85.98 83.82,87.5 90.17,87.5 92.58,85.09 D11.A | U$26.DRAIN7 80.14,84.84 79.63,84.84 79.38,85.09 U$26.DRAIN_ALL
N$27  (via drill 0.61)
  Top 0.254: v34.42,63.75 33.15,62.48 v26.54,62.48
  Bottom 0.254: U$8.DRAIN_ALL 36.7,64.39 36.7,63.88 U$8.DRAIN5 36.58,63.75 v34.42,63.75 | U$8.DRAIN6 36.7,64.52 U$8.DRAIN_ALL | U$8.DRAIN_ALL 36.7,64.64 36.7,65.02 U$8.DRAIN7 36.7,65.15 36.7,65.66 U$8.DRAIN8 | v26.54,62.48 24.26,64.77 D5.A
N$28
  Top 0.254: U$9.DRAIN8 36.7,63.88 36.7,64.39 U$9.DRAIN_ALL | U$9.DRAIN7 36.7,64.52 U$9.DRAIN_ALL | 36.7,64.64 36.7,65.02 U$9.DRAIN6 36.7,65.15 36.7,65.66 U$9.DRAIN5 | 36.7,64.64 U$9.DRAIN_ALL | 36.7,64.64 31.88,64.64 31.75,64.77 D6.A
N$29
  Top 0.254: U$27.DRAIN5 80.26,84.2 80.26,84.71 U$27.DRAIN6 | U$27.DRAIN8 80.26,85.98 80.26,85.47 U$27.DRAIN7 80.26,85.34 80.26,84.84 U$27.DRAIN6 | U$27.DRAIN6 80.14,84.84 79.63,84.84 79.38,85.09 U$27.DRAIN_ALL | U$27.DRAIN6 80.39,84.84 84.84,84.84 85.09,85.09 D12.A
N$31  (via drill 0.61)
  Top 0.254: v27.43,57.78 v34.42,57.78
  Bottom 0.254: U$10.DRAIN5 36.7,53.72 36.7,54.23 U$10.DRAIN_ALL | U$10.DRAIN6 36.7,54.36 U$10.DRAIN_ALL | U$10.DRAIN_ALL 36.7,54.48 36.7,54.86 U$10.DRAIN7 36.7,54.99 36.7,55.5 U$10.DRAIN8 36.58,55.63 v34.42,57.78 | v27.43,57.78 24.26,54.61 D7.A
N$32
  Top 0.254: U$11.DRAIN8 36.7,53.72 36.7,54.23 U$11.DRAIN_ALL | U$11.DRAIN7 36.7,54.36 U$11.DRAIN_ALL | 36.7,54.48 36.7,54.86 U$11.DRAIN6 36.7,54.99 36.7,55.5 U$11.DRAIN5 | 36.7,54.48 U$11.DRAIN_ALL | 36.7,54.48 31.88,54.48 31.75,54.61 D8.A
N$34  (via drill 0.61)
  Top 0.254: v82.04,74.04 82.3,74.04 83.69,72.64 v90.3,72.64
  Bottom 0.254: U$30.DRAIN7 80.26,74.55 80.26,74.04 U$30.DRAIN8 80.39,74.04 v82.04,74.04 | U$30.DRAIN5 80.26,75.82 80.26,75.31 U$30.DRAIN6 80.26,75.18 80.26,74.68 U$30.DRAIN7 | U$30.DRAIN7 80.14,74.68 79.63,74.68 79.38,74.93 U$30.DRAIN_ALL | v90.3,72.64 92.58,74.93 D13.A
N$35
  Bottom 0.254: U$12.DRAIN_ALL 36.7,44.07 36.7,43.56 U$12.DRAIN5 36.58,43.43 34.42,43.43 33.15,42.16 26.54,42.16 24.26,44.45 D9.A | U$12.DRAIN6 36.7,44.2 U$12.DRAIN_ALL | U$12.DRAIN_ALL 36.7,44.32 36.7,44.7 U$12.DRAIN7 36.7,44.83 36.7,45.34 U$12.DRAIN8
N$36
  Top 0.254: U$13.DRAIN8 36.7,43.56 36.7,44.07 U$13.DRAIN_ALL | U$13.DRAIN7 36.7,44.2 U$13.DRAIN_ALL | 36.7,44.32 36.7,44.7 U$13.DRAIN6 36.7,44.83 36.7,45.34 U$13.DRAIN5 | 36.7,44.32 U$13.DRAIN_ALL | 36.7,44.32 31.88,44.32 31.75,44.45 D10.A
N$37
  Top 0.254: U$31.DRAIN5 80.26,74.04 80.26,74.55 U$31.DRAIN6 | U$31.DRAIN7 80.26,75.31 80.26,75.82 U$31.DRAIN8 | U$31.DRAIN6 80.26,74.68 80.26,75.18 U$31.DRAIN7 | U$31.DRAIN6 80.14,74.68 79.63,74.68 79.38,74.93 U$31.DRAIN_ALL | U$31.DRAIN7 80.39,75.18 84.84,75.18 85.09,74.93 D14.A
N$38  (via drill 0.61)
  Top 0.254: v89.41,61.59 v80.26,61.59
  Bottom 0.254: U$32.DRAIN7 80.26,64.39 80.26,63.88 U$32.DRAIN8 80.26,63.75 v80.26,61.59 | U$32.DRAIN5 80.26,65.66 80.26,65.15 U$32.DRAIN6 80.26,65.02 80.26,64.52 U$32.DRAIN7 | U$32.DRAIN7 80.14,64.52 79.63,64.52 79.38,64.77 U$32.DRAIN_ALL | v89.41,61.59 92.58,64.77 D15.A
N$39
  Top 0.254: U$33.DRAIN5 80.26,63.88 80.26,64.39 U$33.DRAIN6 | U$33.DRAIN8 80.26,65.66 80.26,65.15 U$33.DRAIN7 80.26,65.02 80.26,64.52 U$33.DRAIN6 | U$33.DRAIN6 80.14,64.52 79.63,64.52 79.38,64.77 U$33.DRAIN_ALL | U$33.DRAIN6 80.39,64.52 84.84,64.52 85.09,64.77 D16.A
N$41  (via drill 0.61)
  Top 0.254: v82.04,55.5 82.3,55.5 83.69,56.9 v90.3,56.9
  Bottom 0.254: U$34.DRAIN8 80.26,53.72 80.26,54.23 U$34.DRAIN7 | U$34.DRAIN7 80.26,54.36 80.26,54.86 U$34.DRAIN6 80.26,54.99 80.26,55.5 U$34.DRAIN5 80.39,55.5 v82.04,55.5 | U$34.DRAIN7 80.14,54.36 79.63,54.36 79.38,54.61 U$34.DRAIN_ALL | v90.3,56.9 92.58,54.61 D17.A
N$42
  Top 0.254: U$35.DRAIN5 80.26,53.72 80.26,54.23 U$35.DRAIN6 | U$35.DRAIN8 80.26,55.5 80.26,54.99 U$35.DRAIN7 80.26,54.86 80.26,54.36 U$35.DRAIN6 | U$35.DRAIN6 80.14,54.36 79.63,54.36 79.38,54.61 U$35.DRAIN_ALL | U$35.DRAIN6 80.39,54.36 84.84,54.36 85.09,54.61 D18.A
N$43
  Bottom 0.254: U$36.DRAIN7 80.26,44.07 80.26,43.56 U$36.DRAIN8 80.39,43.56 82.3,43.56 83.69,42.16 90.3,42.16 92.58,44.45 D19.A | U$36.DRAIN5 80.26,45.34 80.26,44.83 U$36.DRAIN6 80.26,44.7 80.26,44.2 U$36.DRAIN7 | U$36.DRAIN7 80.14,44.2 79.63,44.2 79.38,44.45 U$36.DRAIN_ALL
N$44
  Top 0.254: U$37.DRAIN5 80.26,43.56 80.26,44.07 U$37.DRAIN6 | U$37.DRAIN8 80.26,45.34 80.26,44.83 U$37.DRAIN7 80.26,44.7 80.26,44.2 U$37.DRAIN6 | U$37.DRAIN6 80.14,44.2 79.63,44.2 79.38,44.45 U$37.DRAIN_ALL | U$37.DRAIN6 80.39,44.2 84.84,44.2 85.09,44.45 D20.A
N$45  (via drill 0.61)
  Top 0.254: U$33.SOURCE1 77.34,65.66 77.34,65.15 U$33.SOURCE2 77.34,65.02 77.34,64.52 U$33.SOURCE3 77.22,64.39 76.71,64.39 76.39,64.07 | U$37.SOURCE3 77.34,44.2 77.34,44.7 U$37.SOURCE2 77.34,44.83 77.34,45.34 U$37.SOURCE1 77.22,45.47 77.22,51.31 76.33,52.2 76.33,53.98 77.22,54.86 U$35.SOURCE2 | U$35.SOURCE3 77.34,54.36 77.34,54.86 U$35.SOURCE2 | U$35.SOURCE2 77.34,54.99 77.34,55.5 U$35.SOURCE1 77.22,55.63 75.82,57.02 75.82,63.5 76.39,64.07 | U$31.SOURCE3 77.34,74.68 77.34,75.18 U$31.SOURCE2 | U$31.SOURCE2 77.34,75.31 77.34,75.82 U$31.SOURCE1 77.22,75.95 77.22,82.3 76.96,82.55 76.96,83.06 76.45,83.57 76.45,84.58 77.22,85.34 U$27.SOURCE2 | U$27.SOURCE3 77.34,84.84 77.34,85.34 U$27.SOURCE2 | U$27.SOURCE1 77.34,85.98 77.34,85.47 U$27.SOURCE2 | L2.P$2 70.87,70.36 72.01,69.22 72.77,69.22 76.45,72.9 76.45,74.42 77.22,75.18 U$31.SOURCE2 | v73.03,67.44 76.39,64.07
  Bottom 0.254: v73.03,67.44 70.1,70.36 L2.P$2
N$46
  Bottom 2.54: U$39.P$1 U$51.P$1
N$47  (via drill 0.61)
  Top 0.254: v62.74,16.26 63.75,16.26 D22.C
  Top 2.54: U$39.P$3 72.88,20.81 67.31,15.24 65.11,15.24 D22.C
  Bottom 0.254: U$38.DRAIN7 64.39,16.38 63.88,16.38 U$38.DRAIN8 63.75,16.26 v62.74,16.26 | U$38.DRAIN5 65.66,16.38 65.15,16.38 U$38.DRAIN6 65.02,16.38 64.52,16.38 U$38.DRAIN7 | U$38.DRAIN7 64.52,16.51 64.52,16.89 64.77,17.14 U$38.DRAIN_ALL
N$49  (via drill 0.61)
  Top 0.254: v74.42,50.67 R12.1 | v83.95,50.67 v82.04,50.67
  Bottom 0.254: v82.04,50.67 v74.42,50.67 | v83.95,50.67 85.2,50.67
  Bottom 2.54: D11.C D13.C D15.C D17.C 85.2,50.67 D19.C
N$50
  Top 0.254: L2.P$1 R12.2
N$59  (via drill 0.61)
  Top 0.254: U$13.SOURCE1 39.62,43.56 39.62,44.07 U$13.SOURCE2 | U$13.SOURCE3 39.62,44.7 39.62,44.2 U$13.SOURCE2 | U$11.SOURCE2 39.62,54.23 39.62,53.72 U$11.SOURCE1 39.62,53.59 43.43,49.78 43.43,44.96 42.67,44.2 39.75,44.2 U$13.SOURCE2 | U$11.SOURCE3 39.62,54.86 39.62,54.36 U$11.SOURCE2 | U$5.SOURCE3 39.62,85.34 39.62,84.84 U$5.SOURCE2 39.62,84.71 39.62,84.2 U$5.SOURCE1 39.5,84.07 39.5,82.93 38.99,82.42 38.99,77.72 40.39,76.33 40.39,75.56 39.62,74.8 | U$9.SOURCE2 39.62,64.39 39.62,63.88 U$9.SOURCE1 39.5,63.75 38.99,63.25 38.99,61.34 42.67,57.66 42.67,55.12 41.91,54.36 39.75,54.36 U$11.SOURCE2 | U$9.SOURCE3 39.62,65.02 39.62,64.52 U$9.SOURCE2 | 39.62,74.8 39.62,74.68 U$7.SOURCE2 39.62,74.55 39.62,74.04 U$7.SOURCE1 39.62,73.91 39.62,69.6 42.55,66.67 42.55,66.29 | 39.62,74.8 39.62,75.18 U$7.SOURCE3 | 42.55,66.29 42.55,65.41 41.66,64.52 39.75,64.52 U$9.SOURCE2 | 42.55,66.29 v42.93,66.29
  Bottom 0.254: v42.93,66.29 L1.P$2
N$74  (via drill 0.61)
  Top 0.254: v48.64,51.82 R11.1
  Bottom 0.254: 31.64,51.82 v48.64,51.82
  Bottom 2.54: D1.C D3.C D5.C D7.C 31.64,51.82 D9.C
RELAYA  (via drill 0.61)
  Top 0.254: v59.31,20.83 58.67,20.83 53.59,25.91 v53.59,36.96
  Bottom 0.254: v59.31,20.83 53.98,15.49 51.31,15.49 51.18,15.62 51.18,16.26 U$23.GATE | v53.59,36.96 54.61,36.96 56.9,39.24 SV1.21
RELAYB  (via drill 0.61)
  Top 0.254: v62.1,36.7 59.56,39.24 SV1.22
  Bottom 0.254: v62.1,36.7 65.66,33.15 65.66,19.3 U$38.GATE
VDD_PLANE  (via drill 0.61)
  Top 0.254: 59.75,89.34 59.94,89.53 U$3.16 63.12,89.53 63.75,88.9 v65.41,88.9 70.48,93.98 TEMP2B.1 | 59.75,89.34 57.85,87.44 | 57.85,87.44 v57.4,87 | v54.61,58.8 54.99,58.42 54.99,37.21 56.52,35.69 57.53,35.69 58.55,36.7 59.44,36.7 SV1.24 | CURR1A.1 52.07,90.17 55.12,90.17 57.85,87.44 | CURR1B.1 59.69,89.41 59.75,89.34
  Bottom 0.254: TEMP1A.1 24.64,94.49 24.64,97.79 C4.1 24.77,97.79 24.77,98.17 25.4,98.81 35.05,98.81 36.07,97.79 | 36.07,97.79 36.07,94.49 TEMP2A.1 | 36.07,97.79 C3.1 35.94,98.04 36.7,98.81 43.43,98.81 CURR1A.1 | 86.87,97.79 86.87,94.49 TEMP1B.1 | TEMP2B.1 72.9,94.49 72.9,97.79 C6.1 73.03,97.79 73.03,98.17 73.66,98.81 75.06,98.81 76.07,97.79 86.87,97.79 | 52.45,75.56 53.85,75.56 57.4,79.12 v57.4,87 | 52.45,75.56 U$1.16 | v65.41,88.9 67.18,87.12 67.18,84.45 U$2.16 | v54.61,58.8 51.18,62.23 51.18,72.9 52.45,74.17 52.45,75.56 | 86.87,97.79 C5.1
VREF  (via drill 0.61)
  Top 0.254: v53.47,77.72 54.36,76.83 54.36,75.69 v53.34,74.68 | v53.21,72.52 54.86,70.87 54.86,64.77 53.72,63.63 53.72,58.42 54.48,57.66 54.48,35.18 56.52,33.15 57.53,33.15 58.55,34.16 59.44,34.16 SV1.26
  Bottom 0.254: U$1.15 52.58,76.83 v53.47,77.72 | U$2.15 66.55,83.19 65.79,83.95 65.02,83.95 58.8,77.72 56.9,77.72 53.85,74.68 v53.34,74.68 53.21,74.55 v53.21,72.52
X0A  (via drill 0.61)
  Top 0.254: v28.7,81.92 v36.83,81.92 | v28.7,61.59 37.47,61.59 v41.66,57.4
  Bottom 0.254: v36.83,81.92 38.99,84.07 39.5,84.07 U$4.GATE | v28.7,61.59 v28.7,81.92 | v41.66,57.4 55.63,57.4 56.77,58.55 57.53,58.55 58.17,59.18 58.17,63.5 57.02,64.64 SV1.1
X0B  (via drill 0.61)
  Top 0.254: v88.77,86.61 v86.36,89.03 | v88.77,71.75 77.34,71.75 v76.58,70.99 | v62.99,66.29 61.09,66.29 59.56,64.77 SV1.2
  Bottom 0.254: v86.36,89.03 80.77,89.03 77.85,86.11 77.34,86.11 U$26.GATE | v88.77,71.75 v88.77,86.61 | v76.58,70.99 71.5,70.99 70.99,71.5 68.2,71.5 v62.99,66.29
X1A  (via drill 0.61)
  Top 0.254: v41.66,71.25 42.04,71.25 48.13,65.15 v53.98,65.15
  Bottom 0.254: v41.66,71.25 39.62,73.28 39.62,73.91 U$6.GATE | v53.98,65.15 56.9,62.23 SV1.3
X1B  (via drill 0.61)
  Top 0.254: v71.12,72.77 v74.3,75.95 | v62.1,64.77 59.56,62.23 SV1.4
  Bottom 0.254: v74.3,75.95 77.22,75.95 U$30.GATE | v71.12,72.77 68.2,72.77 62.1,66.67 v62.1,64.77
X2A  (via drill 0.61)
  Top 0.254: v52.07,62.61 v39.88,62.61
  Bottom 0.254: v39.88,62.61 39.62,62.87 39.62,63.75 U$8.GATE | v52.07,62.61 53.98,62.61 56.9,59.69 SV1.5
X2B  (via drill 0.61)
  Top 0.254: v66.42,72.26 66.42,63.63 v66.67,63.37 | v63.25,63.37 59.56,59.69 SV1.6
  Bottom 0.254: v66.42,72.26 67.82,73.66 71.5,73.66 71.88,73.28 75.56,73.28 77.47,71.37 77.47,70.61 77.34,70.48 77.34,65.79 U$32.GATE | v63.25,63.37 v66.67,63.37
X3A
  Bottom 0.254: U$10.GATE 39.62,53.72 53.59,53.72 56.9,57.02 SV1.7
X3B  (via drill 0.61)
  Top 0.254: v76.71,58.04 v78.23,56.52 | v68.07,51.31 65.28,51.31 59.56,57.02 SV1.8
  Bottom 0.254: v78.23,56.52 77.34,55.63 U$34.GATE | v76.71,58.04 74.8,58.04 v68.07,51.31
X4A  (via drill 0.61)
  Top 0.254: v40.39,42.55 45.85,42.55 v51.82,48.51
  Bottom 0.254: v40.39,42.55 40.39,42.67 39.62,43.43 U$12.GATE | v51.82,48.51 54.23,50.93 57.53,50.93 58.17,51.56 58.17,53.34 57.02,54.48 SV1.9
X4B  (via drill 0.61)
  Top 0.254: v74.17,48.51 66.55,48.51 60.58,54.48 59.56,54.48 SV1.10
  Bottom 0.254: v74.17,48.51 77.22,45.47 U$36.GATE
Y0A  (via drill 0.61)
  Top 0.254: v35.05,85.85 35.94,86.74 38.35,86.74 38.99,86.11 39.5,86.11 U$5.GATE | v33.66,68.33 34.67,67.31 v34.67,65.53
  Bottom 0.254: v35.05,85.85 33.66,84.45 v33.66,68.33 | v34.67,65.53 34.67,65.28 33.53,64.14 33.53,55.63 36.45,52.7 56.26,52.7 56.9,52.07 SV1.11
Y0B  (via drill 0.61)
  Top 0.254: v77.98,82.8 77.34,83.44 77.34,84.07 U$27.GATE | v63.63,71.5 63.63,70.48 58.29,65.15 58.29,53.21 59.44,52.07 SV1.12
  Bottom 0.254: v77.98,82.8 76.45,81.28 76.45,81.15 74.04,78.74 69.85,78.74 68.58,80.01 65.41,80.01 63.63,78.23 v63.63,71.5
Y1A  (via drill 0.61)
  Top 0.254: v38.61,76.83 39.5,75.95 U$7.GATE | v46.99,63.5 v41.02,69.47 | v46.99,61.47 52.07,56.39 52.07,51.44 53.59,49.91 v53.59,49.02
  Bottom 0.254: v38.61,76.83 36.45,76.83 34.16,74.55 34.16,73.53 38.23,69.47 v41.02,69.47 | v46.99,61.47 v46.99,63.5 | v53.59,49.02 56.52,49.02 56.9,49.4 SV1.13
Y1B  (via drill 0.61)
  Top 0.254: v71.75,67.44 77.22,72.9 77.22,73.91 U$31.GATE | v62.48,49.53 59.56,49.53 SV1.14
  Bottom 0.254: v71.75,67.44 71.75,58.8 v62.48,49.53
Y2A  (via drill 0.61)
  Top 0.254: v41.66,65.79 39.62,65.79 U$9.GATE | v41.66,59.94 41.66,59.44 45.09,56.01 45.09,50.29 v48.64,46.74
  Bottom 0.254: v41.66,59.94 v41.66,65.79 | v48.64,46.74 53.09,46.74 56.52,43.31 57.53,43.31 58.17,43.94 58.17,45.72 57.02,46.86 SV1.15
Y2B  (via drill 0.61)
  Top 0.254: v76.71,61.21 77.22,61.72 77.22,63.75 U$33.GATE | v62.48,46.99 59.56,46.99 SV1.16
  Bottom 0.254: v62.48,46.99 v76.71,61.21
Y3A  (via drill 0.61)
  Top 0.254: v41.78,55.5 39.62,55.5 U$11.GATE | v47.24,55.5 52.7,50.04 52.7,48.39 v53.59,47.5
  Bottom 0.254: v47.24,55.5 v41.78,55.5 | v53.59,47.5 53.85,47.5 56.9,44.45 SV1.17
Y3B  (via drill 0.61)
  Top 0.254: v77.22,52.58 77.22,53.59 U$35.GATE | v63.75,44.45 59.56,44.45 SV1.18
  Bottom 0.254: v77.22,52.58 71.88,52.58 v63.75,44.45
Y4A  (via drill 0.61)
  Top 0.254: v42.55,45.34 39.62,45.34 U$13.GATE
  Bottom 0.254: v42.55,45.34 53.47,45.34 56.9,41.91 SV1.19
Y4B
  Top 0.254: U$37.GATE 77.22,43.43 61.09,43.43 59.56,41.91 SV1.20